# Altium PCB HW_V4.1.PcbDoc
Units mm, origin at the board's own origin, x right, y up, seen from the top; angles counter-clockwise.
Board outline 30 x 40 mm, 2 copper layers (Top Layer, Bottom Layer); 40 components, 35 nets, 202 pads, 50 vias.
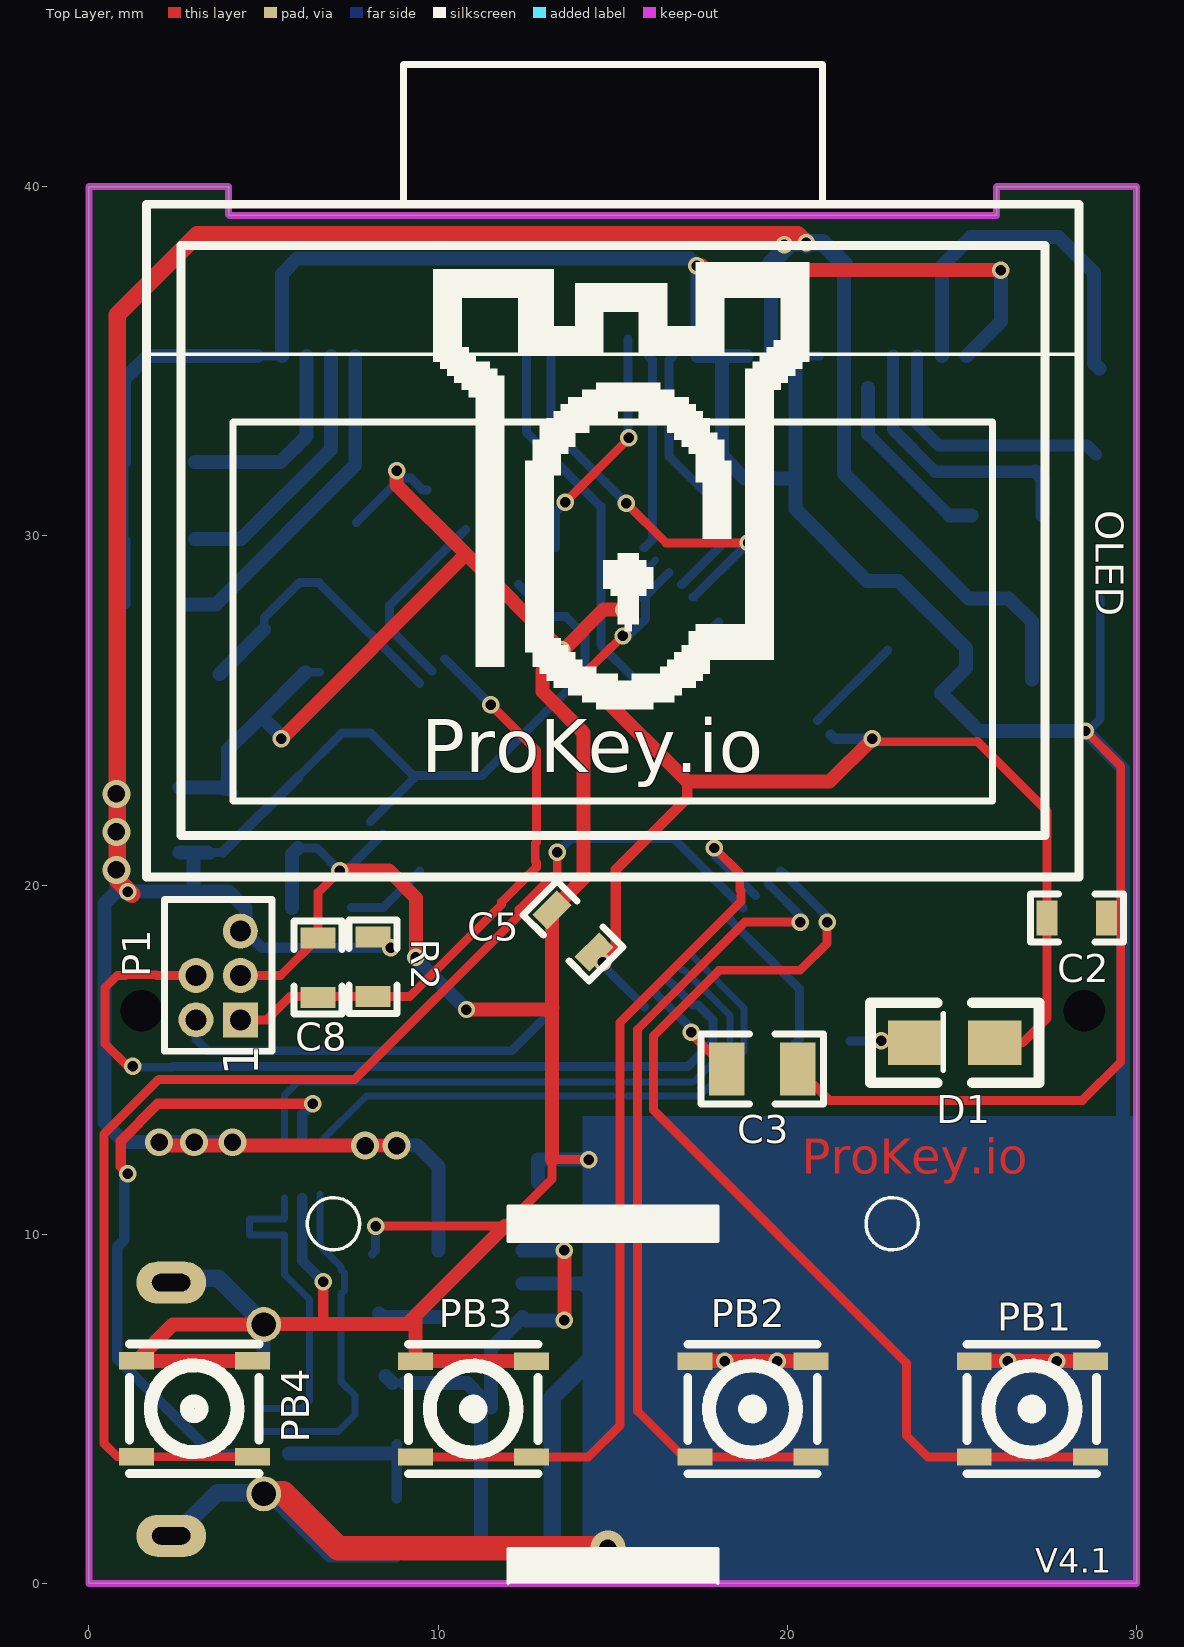
[diagram p0: Top Layer view]
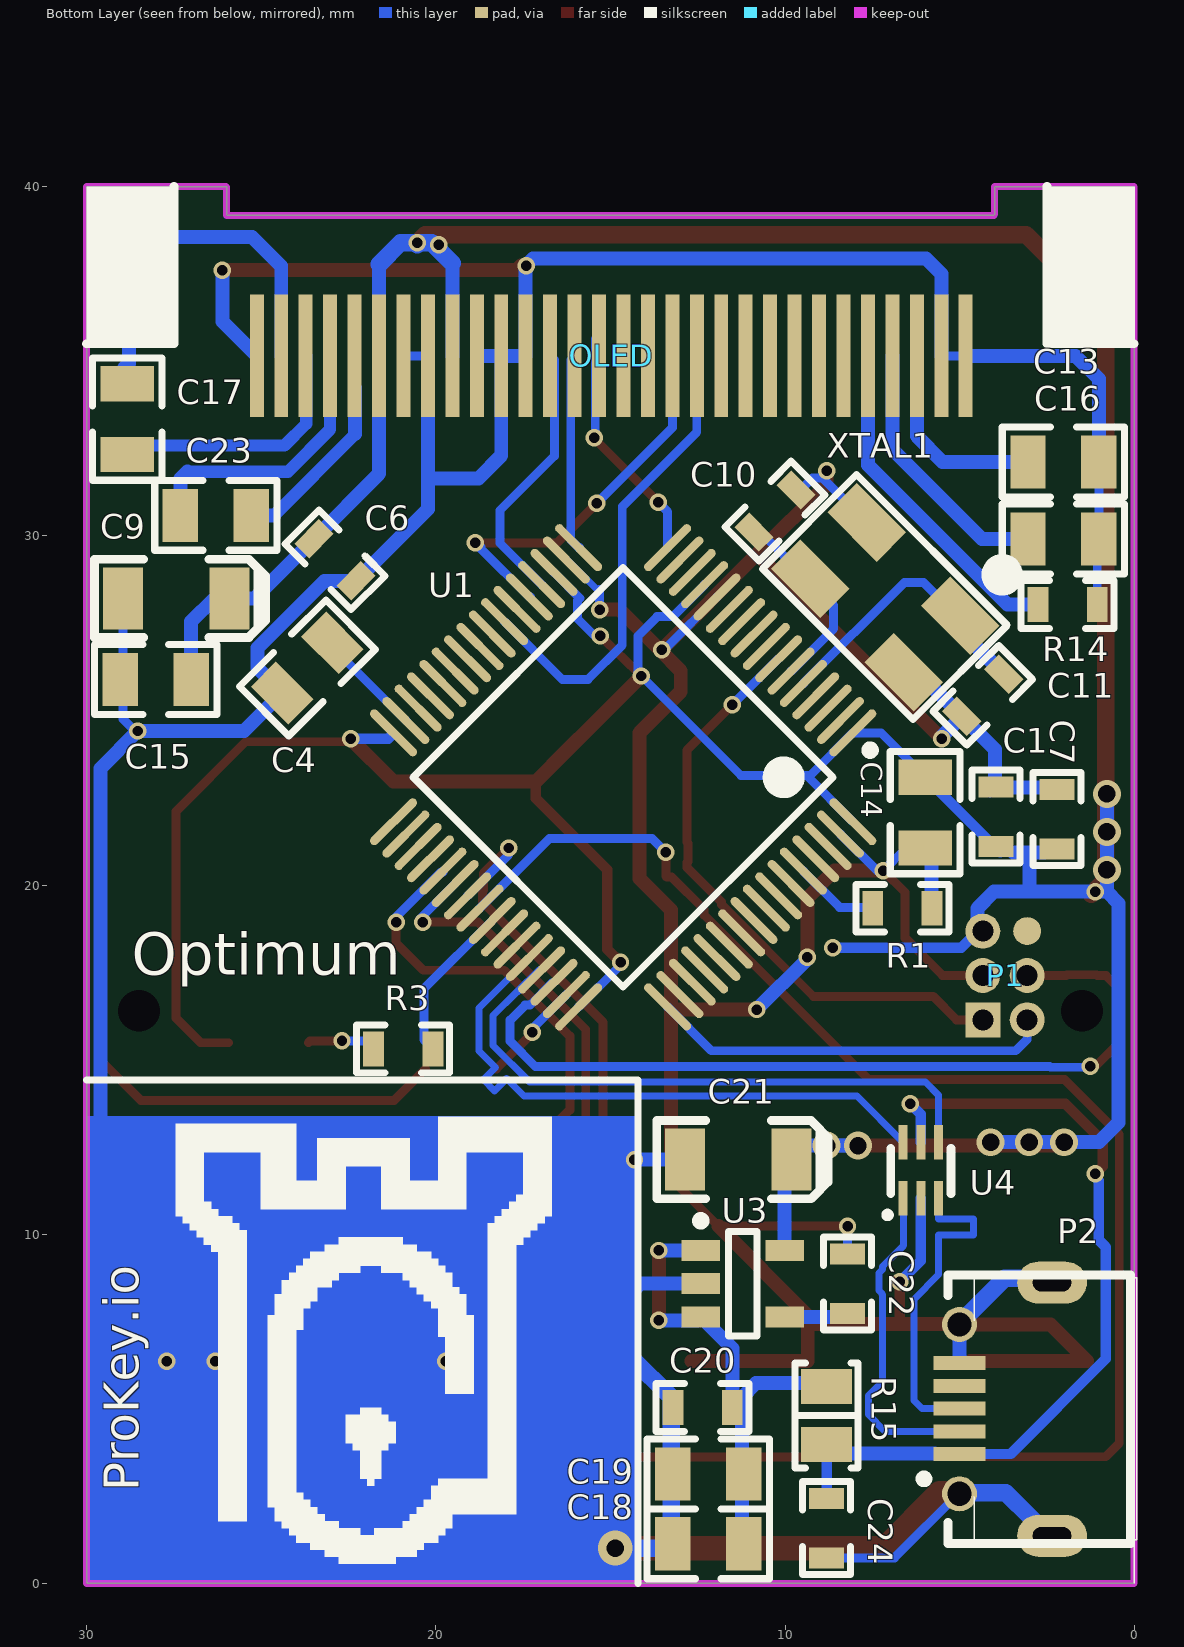
[diagram p1: Bottom Layer view, seen from below]

## Layer stack, top to bottom
Top Solder: solder mask 0.0102, Solder Resist, Dk 3.5
Top Layer: signal copper 0.0356
Dielectric 1: dielectric 0.32, FR-4, Dk 4.8
Bottom Layer: signal copper 0.0356
Bottom Solder: solder mask 0.0102, Solder Resist, Dk 3.5

## Board outline
0,0 0,40 4,40 4,39.195 4.021,39.174 25.992,39.174 25.992,39.992 26,40 30,40 30,0

## Design rules (kind name [scope] priority, off if disabled: settings)
Clearance Clearance_2 [OnLayer('Bottom Layer') vs OnLayer('Bottom Overlay')] p1: gap=0 ignorepadtopadclearanceinfootprint=FALSE
Clearance Clearance_1 [OnLayer('Bottom Layer') vs OnLayer('Keep-Out Layer')] p2: gap=0 ignorepadtopadclearanceinfootprint=FALSE
Clearance [All] p3: gap=0.2 ignorepadtopadclearanceinfootprint=FALSE
ComponentClearance [All] p1: gap=0 collisioncheckmode=3 verticalgap=0 showdistances=FALSE
PolygonConnect [All] p1: connectstyle=Relief reliefconductorwidth=0.254 reliefentries=4 polygonreliefangle="90 Angle" airgapwidth=0.254
RoutingVias [All] p1: holewidth=0.5 width=0.7 viastyle="Through Hole" minholewidth=0.2 minwidth=0.4 maxholewidth=0.711 maxwidth=1.27
SolderMaskExpansion [All] p1: expansion=0.102 istentingtop=FALSE
Width [All] p1: maxlimit=1 minlimit=0.15 preferedwidth=0.2
29 further rules are at their usual default settings.

## Components (designator, comment, footprint, x,y, rotation, side; value= is the part's Value field where it differs from the comment)
C1 "100nF" 0603 3.96,22.81 r0 bottom
C2 "100nF" 0603 29.139,19.054 r90 top
C3 "2u2/25V" 0805 20.292,14.735 r180 top value=100nF
C4 "2u2/25V" 0805 24.397,25.498 r135 bottom value=100nF
C5 "100nF" 0603 13.26,19.285 r225 top
C6 "100nF" 0603 22.285,28.71 r135 bottom
C7 "100nF" 0603 2.21,22.737 r0 bottom
C8 "100nF" 0603 6.56,16.783 r0 top
C9 "10uF" 3216P 25.91,28.21 r0 bottom value=1uF
C10 "22pF" 0603 9.685,31.31 r45 bottom
C11 "22pF" 0603 4.938,24.832 r225 bottom
C13 "2u2/25V" 0805 3.042,32.11 r180 bottom value=100nF
C14 "1uF/16V" 0805 5.985,21.06 r90 bottom value=100nF
C15 "1uF/16V" 0805 27.003,25.885 r0 bottom value=100nF
C16 "4.7uF/16V" 0805 3.042,29.91 r180 bottom value=100nF
C17 "1uF/16V" 0805 28.835,34.36 r270 bottom value=100nF
C18 "10uF" 0805 13.21,1.135 r180 bottom value=100nF
C19 "1uF" 0805 13.21,3.135 r180 bottom value=100nF
C20 "100nF" 0603 13.212,5.035 r270 bottom
C21 "2.2uF" 3216P 9.81,12.135 r0 bottom value=1uF
C22 "470pF" 0603 8.21,9.437 r0 bottom
C23 "1uF/16V" 0805 27.31,30.585 r180 bottom value=100nF
C24 "100nF" 0603 8.81,2.435 r0 bottom
D1 "ERR LED" d805 25.935,15.485 r180 top
OLED "OLED_0.96Inch" OLED_0.96 27.335,35.635 r180 top locked
P1 "MHDR2X3" MHDR2X3 4.335,16.14 r90 top
P2 "USB Micro" USB_MICRO 5.004,3.707 r0 bottom locked
PB1 "PUSH BUTTON" TACTIC_SW_3.7_3.7_0.35 27,4.996 r90 top locked
PB2 "PUSH BUTTON" TACTIC_SW_3.7_3.7_0.35 19,4.996 r90 top locked
PB3 "PUSH BUTTON" TACTIC_SW_3.7_3.7_0.35 11,4.996 r90 top locked
PB4 "PUSH BUTTON" TACTIC_SW_3.7_3.7_0.35 3.01,5.003 r90 top locked
R1 "1K" 0603 7.487,19.335 r270 bottom
R2 "1K" 0603 8.135,16.81 r0 top
R3 "330R" 0603 21.785,15.31 r270 bottom value=1K
R14 "910K" 0603 1.058,28.035 r90 bottom value=1K
R15 "PTC Fuse" "NTC 0805/2012" 8.81,4.81 r90 bottom
U1 "STM32F205RET6" STM-LQFP64_N 14.635,23.085 r315 bottom locked
U3 "MIC5219" SOT-23-5 12.41,9.535 r180 bottom
U4 "USBLC6-2" SOT-666 6.618,11.035 r180 bottom
XTAL1 "8Mhz" XTAL_XYC 4.984,27.709 r315 bottom

## Footprints (in the part's own frame and the unit in brackets; to place one, negate y for a bottom-side part, rotate by r counter-clockwise, add the part's x,y. Pads: shape width x height; smd on the part's side, far side on the other; paste and mask are expansions set on the pad)
0603 [mm]
  rect 1x0.6 smd: 1(0,0) 2(0,1.702)
  silkscreen extent -0.69,-0.48 0.69,2.18, body extent -0.42,0.09 0.43,1.69, height 0.45
0805 [mil] "35"
  rect 40x60 smd: 1(0,0) 2(80,0)
  Top Layer pour cut-out: 55,35.43 25,35.43 25,-35.43 55,-35.43
  silkscreen extent -29,-39 109,39
3216P [mil] "35"
  rect 45x70 smd: 1(0,0) 2(120,0)
  Top Layer pour cut-out: 24,-35 96,-35 96,35 24,35
  silkscreen extent -41,-44 152,44
d805 [mil]
  rect 60x50 smd: 1(0,0) 2(90,0)
  silkscreen extent -50,-45 140,45
MHDR2X3 [mm] "Connector; Header; 3x2 Position"
  rect 1x1 hole 0.6: 1(0,0)
  round 1 hole 0.6: 2(0,1.27) 3(1.27,0) 4(1.27,1.27) 5(2.54,0)
  round 0.8 smd far side: 6(2.54,1.27)
  silkscreen extent -0.9,-0.9 3.44,2.17
"NTC 0805/2012" [mm] "Chip Thermistor, 2-Leads, Body 2.00x1.25mm, IPC Medium Density"
  rect 1x1.45 smd: 1(-0.825,0) 2(0.825,0)
  silkscreen extent -1.5,-0.9 1.5,0.9, body extent -1,-0.64 1,0.64, height 1.27
OLED_0.96 [mm]
  rect 0.4x3.5 smd far side paste+0 mask+0.02: 1(2.21,0.483) 2(2.91,0.483) 3(3.61,0.483) 4(4.31,0.483) 5(5.01,0.483) 6(5.71,0.483) 7(6.41,0.483) 8(7.11,0.483) 9(7.81,0.483) 10(8.51,0.483) 11(9.21,0.483) 12(9.91,0.483) 13(10.61,0.483) 14(11.31,0.483) 15(12.01,0.483) 16(12.71,0.483) 17(13.41,0.483) 18(14.11,0.483) 19(14.81,0.483) 20(15.51,0.483) 21(16.21,0.483) 22(16.91,0.483) 23(17.61,0.483) 24(18.31,0.483) 25(19.01,0.483) 26(19.71,0.483) 27(20.41,0.483) 28(21.11,0.483) 29(21.81,0.483) 30(22.51,0.483)
  silkscreen extent -1.02,-7.86 25.68,15.4, body extent -1.06,-3.89 25.64,15.37, height 1.6
SOT-23-5 [mm]
  rect 1.1x0.6 smd: 1(0,0) 2(0,-0.95) 3(0,-1.9) 4(2.4,-1.9) 5(2.4,0)
  silkscreen extent -0.13,-2.45 1.61,0.97, body extent -0.18,-2.41 2.62,0.49, height 1.08
SOT-666 [mil]
  rect 10x38.98 smd: 1(0,0) 2(20,0) 3(40,0) 4(40,63) 5(20,63) 6(0,63)
  silkscreen extent -20,-21 54,56
STM-LQFP64_N [mm] "Thin QFP, 64-Leads, Body 10x10mm, Pitch 0.5mm, IPC Medium Density"
  oval 1.8x0.25 smd: 1(-5.55,3.75) 2(-5.55,3.25) 3(-5.55,2.75) 4(-5.55,2.25) 5(-5.55,1.75) 6(-5.55,1.25) 7(-5.55,0.75) 8(-5.55,0.25) 9(-5.55,-0.25) 10(-5.55,-0.75) 11(-5.55,-1.25) 12(-5.55,-1.75) 13(-5.55,-2.25) 14(-5.55,-2.75) 15(-5.55,-3.25) 16(-5.55,-3.75) 33(5.55,-3.75) 34(5.55,-3.25) 35(5.55,-2.75) 36(5.55,-2.25) 37(5.55,-1.75) 38(5.55,-1.25) 39(5.55,-0.75) 40(5.55,-0.25) 41(5.55,0.25) 42(5.55,0.75) 43(5.55,1.25) 44(5.55,1.75) 45(5.55,2.25) 46(5.55,2.75) 47(5.55,3.25) 48(5.55,3.75)
  oval 0.25x1.8 smd: 17(-3.75,-5.55) 18(-3.25,-5.55) 19(-2.75,-5.55) 20(-2.25,-5.55) 21(-1.75,-5.55) 22(-1.25,-5.55) 23(-0.75,-5.55) 24(-0.25,-5.55) 25(0.25,-5.55) 26(0.75,-5.55) 27(1.25,-5.55) 28(1.75,-5.55) 29(2.25,-5.55) 30(2.75,-5.55) 31(3.25,-5.55) 32(3.75,-5.55) 49(3.75,5.55) 50(3.25,5.55) 51(2.75,5.55) 52(2.25,5.55) 53(1.75,5.55) 54(1.25,5.55) 55(0.75,5.55) 56(0.25,5.55) 57(-0.25,5.55) 58(-0.75,5.55) 59(-1.25,5.55) 60(-1.75,5.55) 61(-2.25,5.55) 62(-2.75,5.55) 63(-3.25,5.55) 64(-3.75,5.55)
  silkscreen extent -5.67,-4.25 4.25,4.57, body extent -5,-5 5,5, height 1.6
TACTIC_SW_3.7_3.7_0.35 [mm]
  rect 0.5x1 smd: 1(1.372,1.651) 2(-1.375,1.651) 3(-1.375,-1.676) 4(1.372,-1.676)
  silkscreen extent -1.85,-1.85 1.85,1.85
USB_MICRO [mm]
  rect 1.5x0.4 smd paste+0 mask+0.076: 1(0,0) 2(0,-0.65) 3(0,-1.3) 4(0,-1.95) 5(0,-2.6)
  oval 2x1.2 hole 0.5 slot 1.1 at 0 deg: 6(-2.65,-4.908) 6(-2.65,2.342)
  round 1 hole 0.7: 6(0,-3.708) 6(0,1.142)
  silkscreen extent -4.9,-5.13 1.13,2.57
XTAL_XYC [mm]
  rect 1.2x2 smd paste+0 mask+0.102: 1(0,0) 2(0,-3.785) 3(2.286,-3.785) 4(2.286,0)
  silkscreen extent -1.87,-4.95 3.05,1.14

## Part data
C1 C2 C5 C6 C7 C8 C10 C11 C22: library part CAP, "Capacitor"
C3 C4 C13 C14 C15 C16 C17 C18 C19 C20 C23 C24: library part "Cap Semi", "Capacitor (Semiconductor SIM Model)", LatestRevisionDate=17-Jul-2002, LatestRevisionNote="Re-released for DXP Platform.", PackageReference=C1206, Published=8-Jun-2000, Publisher="Altium Limited"
C9 C21: library part "Cap Pol3", "Polarized Capacitor (Surface Mount)", LatestRevisionDate=17-Jul-2002, LatestRevisionNote="Re-released for DXP Platform.", PackageReference=C0805, Published=8-Jun-2000, Publisher="Altium Limited"
D1: library part "LED SMD", "Typical BLUE SiC LED", DatasheetVersion=16-Apr-2002, LatestRevisionDate=17-Dec-2003, LatestRevisionNote="PCB Footprint replaced.", PackageDescription="SM LED; 2 C-Bend Leads; Body 3.5 x 2.8 x 1.9 mm, inc leads (LxWxH typ)", PackageReference=3.5X2.8X1.9, PackageVersion=16-Apr-2002, Published=8-Jun-2000, Publisher="Altium Limited"
OLED: library part OLED_0.96
P1: "Header, 3-Pin, Dual row", LatestRevisionDate=17-Jul-2002, LatestRevisionNote="Re-released for DXP Platform.", Publisher="Altium Limited"
R1 R2: library part RES, "Resisor"
R3 R14: library part "Res Semi", "Semiconductor Resistor"
R15: library part Thermistor, "SMT Resistor", Manufactur=LittleFuse, Manufacture PN=0805L035
U1: "ARM Cortex-M3 32-bit MCU, 512 KB Flash, 128 KB Internal RAM, 51 I/Os, 64-pin LQFP, -40 to 85 degC, Tray", I/Os (High Current)=51, Operating Frequency(F) (Processor speed) (MHz)=120, Supplier Part Number 1=497-11155-ND, Supply Voltage(Vcc) min (V)=1.8, ComponentLink1Description="Manufacturer URL", ComponentLink1URL=http://www.st.com/web/en/home.html, ComponentLink2Description=Datasheet, ComponentLink2URL=http://www.st.com/st-web-ui/static/active/en/resource/technical/document/datasheet/CD00237391.pdf, ComponentLink3Description="Package Specification", ComponentLink3URL=http://www.st.com/st-web-ui/static/active/en/resource/technical/document/datasheet/DM00037051.pdf, Core="ARM Cortex-M3", D/A Converter="2x12-bit (2 Channel)", DatasheetVersion="Rev. 9", FLASH Size (Prog) (kB)=512, Internal RAM Size (kB)=128, Mounting Technology="Surface Mount", PackageDescription="64-Pin Low Profile Quad Flat Package, 10 x 10 mm Body, 0.5 mm Pitch", PackageReference=LQFP64, PackageVersion="Rev. 4, 06/2013", Packing=Tray, PartNumber=STM32F205RET6, Supplier 1=Digi-Key, Supplier 2=Farnell, Supplier 3=Newark, Supplier 4=Mouser, Supplier Part Number 2=2060897, Supplier Part Number 3=47T9329, Supplier Part Number 4=511-STM32F205RET6
U3: library part MIC5219-3.3BM5
XTAL1: library part XTAL_XYC

## Free pads (board coordinates)
  round 0 hole 1.2: 0(1.5,16.4) 0(28.5,16.4)
  round 1.4 on Top Overlay: 2(7,10.3) 2(23,10.3)

## Via types
v1: diameter 0.5, hole 0.3, Top Layer to Bottom Layer, 41 vias
v2: diameter 0.8, hole 0.5, Top Layer to Bottom Layer, 8 vias
v3: diameter 1, hole 0.5, Top Layer to Bottom Layer, 1 vias

## Nets (pads, with @x,y where several pads share a name; then routed paths per layer and width w, separated by ;. In a path a pad name is that pad's centre, name@x,y a point inside that pad or via, vN(x,y) a via of type N, cw(c..) or ccw(c..) an arc to the next point about the centre after c; other vN are vias at no path point)
3V3: C1.2 C2.2 C5.2 C6.2 C7.2 C9.1 C14.2 C15.1 C21.1 D1.1 OLED.6 OLED.9 P1.5 R2.2 U1.1 U1.13 U1.19 U1.32 U1.48 U1.64 U3.5 | length 149.9
  Top Layer w0.254: v1(14.11,25.985) v1(15.291,27.131) ; v1(22.435,24.185) 22.516,24.104 25.421,24.104 25.434,24.116 27.437,22.113 C2.2 27.437,16.189 26.733,15.485 D1.1
  Top Layer w0.3: v1(14.71,17.785) 15.085,18.16 15.085,20.435 17.135,22.485 17.135,22.96
  Top Layer w0.4: v2@2.01,12.535 v2(7.91,12.535) v2(8.81,12.535) ; v1(14.11,25.985) 15.51,24.585 16.235,23.86 17.135,22.96 21.21,22.96 v1(22.435,24.185)
  Top Layer w0.5: v1@1.225,19.735 0.81,20.15 0.81,36.335 3.099,38.624 20.296,38.624 v1(20.535,38.385)
  Bottom Layer w0.254: 3.4,20.935 3.48,20.855 3.56,20.935 C1.2@3.835,20.935 ; C14.2 7.251,24.358 U1.1 9.282,23.135 9.382,23.135 ; U1.64 9.382,23.135 ; U1.13 13.217,27.685 13.66,27.685 14.206,27.139 14.206,26.081 v1(14.11,25.985) 11.26,23.135 9.382,23.135 ; v1(14.71,17.785) 14.71,17.707 U1.48 ; v1(15.291,27.131) 15.448,27.131 15.941,27.624 15.941,28.146 15.874,28.213 U1.19
  Bottom Layer w0.3: C1.2@3.835,20.935 C14.2@5.988,23.089 ; P1.5@4.485,18.68 4.955,18.21 v1(8.635,18.21) ; U1.32@21.246,24.299 21.36,24.185 v1(22.435,24.185)
  Bottom Layer w0.4: v2(0.785,22.61) v2(0.785,21.522) v2(0.785,20.435) 0.785,19.81 ; C7.2@2.585,20.935 2.993,20.935 ; 3.4,20.935 2.993,20.935 ; v2@4.01,12.635 v2(3.01,12.635) v2(2.01,12.635) 1.01,12.635 0.446,13.199 0.446,19.471 0.785,19.81 ; P1.5@4.485,18.68 4.485,19.335 4.01,19.81 3.06,19.81 ; v2(7.91,12.535) v2(8.81,12.535) 9.41,12.535 C21.1 10.01,11.935 U3.5 ; OLED.9 19.525,37.8 ; 21.625,37.77 OLED.6 21.625,31.777 C6.2 25.192,28.21 C9.1 26.335,28.21 27.003,27.542 C15.1 ; 0.785,19.81 v1(1.11,19.81) 3.06,19.81 ; 2.993,20.935 2.993,19.877 3.06,19.81
  Bottom Layer w0.5: 19.525,37.8 20.11,38.385 21.01,38.385 21.625,37.77 ; v1@20.535,38.331 v1(20.535,38.385)
  other v1: 19.91,38.335
  other v2: 4.11,12.635
5V: C24.1 P2.1 R15.1 U4.5 | length 23.6
  Top Layer w0.3: v1(1.11,11.735) 0.904,11.941 0.904,12.666 1.973,13.735 v1(6.41,13.735)
  Bottom Layer w0.3: v1(1.11,11.735) 1.11,11.635 1.01,11.535 1.01,9.835 0.81,9.635 0.81,6.435 3.538,3.707 P2.1 ; U4.5 6.11,13.435 v1(6.41,13.735) ; C24.1 8.81,3.724 R15.1
  Bottom Layer w0.4: P2.1@5.721,3.724 R15.1@8.81,3.724
ERR_LED: R3.2 U1.41 | length 4.6
  Bottom Layer w0.254: U1.41 20.341,17.025 20.341,15.568 R3.2
GND: C1.1 C2.1 C3.1 C4.1 C5.1 C6.1 C7.1 C8.2 C9.2 C10.1 C11.1 C13.2 C14.1 C15.2 C16.2 C18.1 C19.1 C20.1 C21.2 C22.1 C24.2 OLED.1 OLED.7 OLED.8 OLED.10 OLED.11 OLED.12 OLED.29 OLED.30 P1.3 P2.5 P2.6 PB1.1 PB1.4 PB2.1 PB2.4 PB3.1 PB3.4 PB4.1 PB4.4 R1.2 R14.1 U1.12 U1.18 U1.63 U3.2 U4.2 XTAL1.2 XTAL1.4 | length 243.3
  Top Layer w0.254: P1.3 5.485,17.41 C8.2 6.56,19.785 v1(7.185,20.41) ; v1(8.21,10.235) 11.91,10.235 13.26,11.585 13.26,12.135 v1(14.31,12.135) ; v1(13.535,26.735) v1@13.585,26.735 ; C3.1 21.192,13.835 28.446,13.835 29.543,14.932 29.543,23.402 v1(28.535,24.41)
  Top Layer w0.3: 6.71,7.432 v1(6.71,8.635)
  Top Layer w0.4: PB4.4 PB4.1 2.399,7.415 P2.6@5.004,7.415 ; P2.6@5.004,7.432 6.71,7.432 9.107,7.432 9.349,7.674 ; v1(5.51,24.185) 10.797,29.473 ; v1(7.185,20.41) 8.585,20.41 9.36,19.635 v1(9.36,17.935) ; v1(8.81,31.86) 8.81,31.46 10.797,29.473 ; v1(10.81,16.435) 13.26,16.435 ; 11.91,10.235 9.349,7.674 ; PB3.4 PB3.1 9.349,7.674 ; 13.26,12.135 13.26,16.435 ; v1(13.535,26.735) 10.797,29.473 ; v1(15.31,27.885) 14.735,27.885 13.585,26.735 12.985,26.135 12.985,25.535 14.16,24.36 14.16,20.185 C5.1 13.26,16.435 ; PB2.1 v1(18.21,6.368) v1(19.71,6.368) PB2.4 ; v1(17.41,37.735) 17.56,37.735 17.685,37.61 v1(26.11,37.61) ; PB1.1 v1(26.31,6.368) v1(27.71,6.368) PB1.4
  Top Layer w0.7: P2.6@5.004,2.582 5.563,2.582 7.135,1.01 v3(14.86,1.01)
  Bottom Layer w0.2: 15.31,28.46 15.381,28.46 U1.18@16.229,29.308
  Bottom Layer w0.254: C13.2 C16.2 1.058,29.862 R14.1 ; P2.6@2.921,1.524 P2.6@2.921,1.846 ; 3.385,22.787 3.933,22.677 C1.1@4.135,22.637 ; OLED.30 OLED.29 ; P2.6@5.004,2.599 6.87,0.733 C24.2 ; v1(5.51,24.185) v1@5.51,24.26 ; C14.1 6.535,21.06 v1(7.185,20.41) 7.364,20.41 U1.63 ; XTAL1.4@6.199,26.092 XTAL1.4 ; XTAL1.2 v1@8.935,31.66 ; C22.1@8.11,9.435 8.21,9.535 v1(8.21,10.235) ; v1(8.81,31.86) 8.935,31.735 v1@8.935,31.66 ; C10.1 9.56,31.31 9.21,31.66 v1@8.935,31.66 ; U1.12 v1@13.385,26.81 ; 14.385,6.453 14.385,8.335 14.385,11.435 ; v1(15.31,27.885) 15.31,28.46 ; OLED.8 OLED.7 ; v1@28.66,24.46 28.958,24.758 C9.2
  Bottom Layer w0.3: U4.2 6.11,9.235 v1(6.71,8.635)
  Bottom Layer w0.4: C13.2 1.01,34.485 1.677,35.152 OLED.30 ; C7.1@2.585,22.787 3.385,22.787 3.985,22.787 3.985,23.878 C11.1 ; P2.5 5.004,7.415 P2.6@5.004,7.432 ; v1@5.51,24.26 C11.1 ; OLED.29 5.525,37.5 5.96,37.935 17.21,37.935 v1(17.41,37.735) ; R1.2@5.81,19.335 5.81,20.885 C14.1 ; XTAL1.4@6.199,26.092 C11.1 ; v1(9.36,17.935) 9.36,17.885 v1(10.81,16.435) ; U3.2 14.135,8.585 14.385,8.335 ; C21.2@12.858,11.483 C21.2 v1(14.31,12.135) 14.71,12.135 ; v1@17.425,37.72 OLED.12 OLED.11 ; OLED.10 OLED.11 ; OLED.8 20.225,31.645 ; OLED.1 26.11,36.137 v1(26.11,37.61) ; 29.56,13.035 29.604,13.079 29.604,23.341 v1(28.535,24.41) 25.485,24.41 C4.1 25.11,26.211 25.11,26.785 23.185,28.71 C6.1 20.225,30.77 20.225,31.645 ; OLED.11 18.125,32.295 18.775,31.645 20.225,31.645
  Bottom Layer w0.5: P2.6@2.21,8.735 3.701,8.735 P2.6@5.004,7.432 ; P2.6@2.921,1.846 3.674,2.599 P2.6@5.004,2.599 ; C18.1@13.262,1.266 13.262,5.035 13.262,5.33 14.385,6.453 ; C18.1@13.267,1.035 13.292,1.01 v3(14.86,1.01)
LCD_CS: OLED.13 U1.20 | length 7.7
  Bottom Layer w0.254: OLED.13 16.604,35.031 16.604,32.285 18.16,30.729 18.16,29.792 U1.20
LCD_D0: OLED.18 U1.21 | length 11.3
  Top Layer w0.254: v1(15.385,30.935) 16.523,29.797 v1(18.873,29.797)
  Bottom Layer w0.254: OLED.18 13.225,33.095 v1(15.385,30.935) ; U1.21@17.289,28.247 U1.21 v1@18.71,29.635 ; v1@18.71,29.685 v1@18.71,29.635 ; v1(18.873,29.797) v1@18.71,29.635
LCD_D1: OLED.19 U1.23 | length 13.6
  Bottom Layer w0.254: OLED.19 12.525,32.97 14.66,30.835 14.66,26.87 15.645,25.885 16.374,25.885 U1.23
LCD_DC: OLED.15 U1.16 | length 6.9
  Top Layer w0.254: v1(13.635,30.96) 15.46,32.785 v1(15.46,32.81)
  Bottom Layer w0.254: U1.16 13.362,30.687 v1(13.635,30.96) ; OLED.15@15.435,35.635 15.435,32.835 v1(15.46,32.81)
LCD_RES: OLED.14 U1.17 | length 5.6
  Bottom Layer w0.254: U1.17@15.885,29.66 U1.17@15.897,29.672 ; U1.17 16.135,29.888 16.135,35.043 OLED.14
NetC3_2: C3.2 U1.47 | length 3.1
  Top Layer w0.254: v1(17.241,15.789) 17.241,15.856 17.237,15.86 17.237,15.758 C3.2
  Bottom Layer w0.254: U1.47 17.241,15.883 v1(17.241,15.789)
NetC4_2: C4.2 U1.31 | length 2.8
  Bottom Layer w0.254: U1.31 C4.2@22.871,26.724
NetC10_2: C10.2 U1.6 XTAL1.3 | length 5.5
  Bottom Layer w0.254: U1.6 8.61,27.342 8.61,28.01 9.311,28.711 9.318,28.711 C10.2@10.788,30.182
NetC11_2: C11.2 U1.5 XTAL1.1 | length 8.2
  Bottom Layer w0.254: XTAL1.1@5.019,27.319 5.019,27.651 6.027,28.66 6.585,28.66 U1.5
  Bottom Layer w0.4: C11.2 XTAL1.1@5.019,27.319
NetC13_1: C13.1 OLED.28 | length 5.8
  Bottom Layer w0.4: C13.1 5.485,32.11 6.225,32.85 OLED.28
NetC16_1: C16.1 OLED.27 | length 7.6
  Bottom Layer w0.4: C16.1 4.36,29.91 6.925,32.475 OLED.27
NetC17_1: C17.1 OLED.2 | length 10.5
  Bottom Layer w0.4: OLED.2 24.425,37.725 25.26,38.56 27.76,38.56 28.785,37.535 28.785,34.935 C17.1@28.935,34.785
NetC17_2: C17.2 OLED.3 | length 7.4
  Bottom Layer w0.35: OLED.3@23.71,35.152 23.71,33.207 24.332,32.585 28.578,32.585 C17.2
NetC18_2: C18.2 C19.2 C20.2 R15.2 U3.1 U3.3 | length 14.1
  Top Layer w0.4: v1(13.61,7.535) v1(13.61,9.535)
  Bottom Layer w0.4: R15.2@8.485,5.942 R15.2@8.685,5.742 ; R15.2@9.035,5.735 10.825,5.735 11.23,5.33 C18.2@11.23,1.266 ; C20.2 11.51,6.735 U3.3 12.51,7.535 v1(13.61,7.535) ; U3.1 v1(13.61,9.535)
NetC22_2: C22.2 U3.4 | length 1.7
  Bottom Layer w0.4: C22.2@8.31,7.735 8.41,7.635 U3.4
NetC23_1: C23.1 OLED.4 | length 8
  Bottom Layer w0.35: OLED.4 23.025,33.043 24.234,31.835 27.11,31.835
  Bottom Layer w0.4: 27.11,31.835 27.31,31.635 C23.1
NetC23_2: C23.2 OLED.5 | length 5.3
  Bottom Layer w0.35: 22.31,32.91 24.635,30.585
  Bottom Layer w0.4: 22.31,32.91 OLED.5@22.31,34.235 ; 24.635,30.585 C23.2
NetD1_2: D1.2 R3.1 | length 1.9
  Top Layer w0.254: v1(22.685,15.535) 23.599,15.535 D1.2
  Bottom Layer w0.254: R3.1@21.785,15.535 v1(22.685,15.535)
NetOLED_26: OLED.26 R14.2 | length 9.6
  Bottom Layer w0.4: R14.2 3.635,28.035 7.625,32.025 OLED.26
NetP2_2: P2.2 U4.1 | length 9.6
  Bottom Layer w0.2: P2.2 7.132,4.357 7.614,4.839 7.614,5.385 7.21,5.789 7.21,8.281 7.314,8.385 7.314,8.885 7.21,8.989 7.21,9.071 6.61,9.671 U4.1@6.61,11.135
NetP2_3: P2.3 U4.3 | length 9.5
  Bottom Layer w0.2: P2.3 6.082,5.007 6.31,5.235 6.31,8.135 5.602,8.843 5.602,9.07 5.602,9.524 5.602,9.978 4.599,9.978 4.599,10.432 5.602,10.432 5.602,10.735 U4.3
NetR1_1: R1.1 U1.60 | length 2.4
  Bottom Layer w0.254: R1.1@7.51,19.36 8.435,19.36 U1.60
NRST: C8.1 P1.1 R2.1 U1.7 | length 17.4
  Top Layer w0.254: P1.1 5.09,16.14 5.76,16.81 7.058,16.81 7.06,16.808 9.183,16.808 11.813,19.438 11.813,19.509 12.81,20.505 12.81,20.643 12.779,20.674 12.779,21.196 12.81,21.227 12.81,23.86 v1(11.51,25.16)
  Bottom Layer w0.254: U1.7 10.191,26.479 v1(11.51,25.16)
PB1: PB1.2 PB1.3 U1.37 | length 28.7
  Top Layer w0.254: v1(21.135,18.935) 21.135,18.335 20.36,17.56 18.045,17.56 16.16,15.675 16.16,13.56 23.41,6.31 23.41,4.235 24.024,3.621 PB1.2 PB1.3
  Bottom Layer w0.254: U1.37 19.797,20.365 19.862,20.365 21.135,19.092 v1(21.135,18.935)
PB2: PB2.2 PB2.3 U1.38 | length 23.6
  Top Layer w0.254: PB2.2@17.01,3.635 15.706,4.939 15.706,15.863 18.782,18.939 v1(20.366,18.939) ; PB2.2 PB2.3
  Bottom Layer w0.254: U1.38 20.453,19.035 20.366,18.949 v1(20.366,18.939)
PB3: PB3.2 PB3.3 U1.39 | length 26.4
  Top Layer w0.254: PB3.2 PB3.3 14.296,3.621 15.21,4.535 15.21,16.068 18.667,19.525 18.667,19.827 18.635,19.859 18.635,20.335 v1(17.91,21.06)
  Bottom Layer w0.254: v1(17.91,21.06) 17.91,20.871 U1.39
PB4: PB4.2 PB4.3 U1.40 | length 36.4
  Top Layer w0.254: PB4.3 PB4.2 0.817,3.628 0.427,4.018 0.427,12.864 1.998,14.435 7.61,14.435 12.317,19.142 12.317,19.3 13.245,20.228 13.387,20.228 13.41,20.251 v1(13.41,20.935)
  Bottom Layer w0.254: v1(13.41,20.935) 13.81,21.335 16.739,21.335 U1.40
SWCLK: P1.2 U1.49 | length 11.5
  Bottom Layer w0.254: P1.2 3.065,15.58 3.391,15.254 12.107,15.254 U1.49
SWDIO: P1.4 U1.46 | length 24.8
  Top Layer w0.254: v1(1.26,14.81) 1.11,14.81 0.46,15.46 0.46,17.06 0.81,17.41 1.052,17.41 1.073,17.431 1.927,17.431 1.948,17.41 P1.4 P1.4@3.215,17.41
  Bottom Layer w0.254: v1(1.26,14.81) 1.287,14.783 2.402,14.783 2.419,14.8 17.145,14.8 17.872,15.527 17.872,16.133 17.443,16.562 17.301,16.562 16.647,17.216 U1.46
uC_USB_DM: U1.44 U4.6 | length 17.5
  Bottom Layer w0.2: U4.6 7.943,13.96 17.476,13.96 17.88,14.365 17.969,14.453 18.317,14.106 18.638,14.427 18.29,14.774 18.451,14.935 18.76,15.244 18.76,16.481 17.322,17.919 U1.44
uC_USB_DP: U1.45 U4.4 | length 17.5
  Bottom Layer w0.2: U4.4 5.602,13.981 5.981,14.36 17.31,14.36 18.36,15.41 18.36,16.26 17.677,16.943 17.666,16.943 17.039,17.57 U1.45
pads on no net: OLED.16 OLED.17 OLED.20 OLED.21 OLED.22 OLED.23 OLED.24 OLED.25 P1.6 P2.4 U1.2 U1.3 U1.4 U1.8 U1.9 U1.10 U1.11 U1.14 U1.15 U1.22 U1.24 U1.25 U1.26 U1.27 U1.28 U1.29 U1.30 U1.33 U1.34 U1.35 U1.36 U1.42 U1.43 U1.50 U1.51 U1.52 U1.53 U1.54 U1.55 U1.56 U1.57 U1.58 U1.59 U1.61 U1.62

## Keep-outs
Keep-Out Layer:
  lines w0.1: 4,39.195 4.021,39.174
  lines w0.2: 4,39.195 4,40 0,40 0,0 30,0 30,40 26,40 ; 4.021,39.174 25.992,39.174 25.992,39.992

## Other copper
Top Layer:
  text "ProKey.io" at 20.41,11.735 h1
Bottom Layer:
  rectangle net GND: 14.135,0 29.985,13.385

## Silkscreen, mask and mechanical layers (free items; w line width, h text height)
Top Overlay:
  drawing of 22 lines, arcs and shapes, not listed
  text "ProKey.io" at 9.51,23.235 h1.52
  text "V4.1" at 27.1,0.3 h0.7
Bottom Overlay:
  drawing of 16 lines, arcs and shapes, not listed
  text "Optimum" at 28.71,17.435 h1.2
  text "ProKey.io" at 28.51,2.635 h1 r270
Mechanical 1:
  lines w0.013: -0.07,1.468 0,1.468 ; -0.07,1.938 0,1.938 ; -0.07,2.52 0,2.52 ; -0.07,7.48 0,7.48 ; -0.07,8.062 0,8.062 ; -0.07,8.532 0,8.532 ; 0,1.25 -0.07,1.25 -0.07,8.75 0,8.75
Mechanical 5:
  circle w0.006: c0,40 r0.003
  circle w0.006: c30,40 r0.003
  circle w0.006: c30,0 r0.003
  circle w0.006: c30,40 r0.003

## Text inside footprints (layer, text, board x,y; h text height)
P1: Top Overlay "1" at 4.843,14.54 h1 r90